# Altium PCB PCB1.PcbDoc
Units mm, origin at the board's own origin, x right, y up, seen from the top; angles counter-clockwise.
Board outline 152.4 x 101.6 mm, 2 copper layers (Top Layer, Bottom Layer); 19 components, 46 nets, 150 pads, 0 vias.
Unrouted connection lines stored in the file: 1.
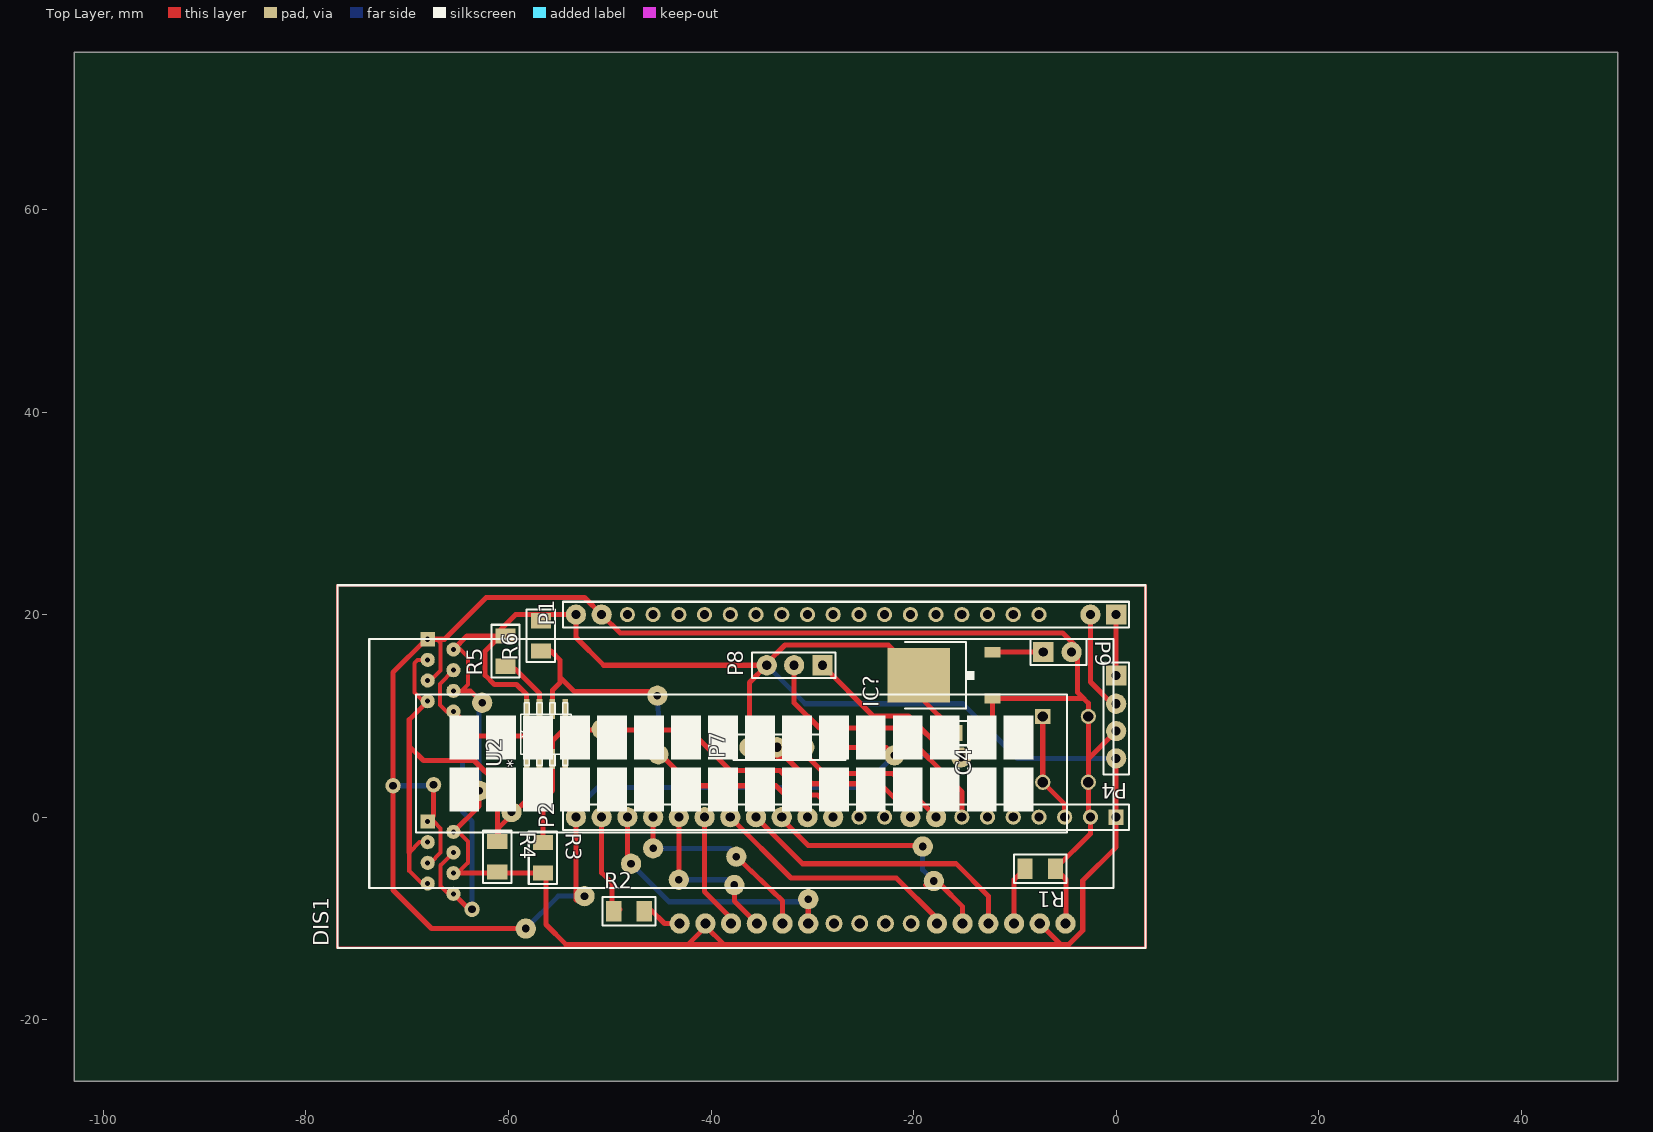
[diagram p0: Top Layer view]
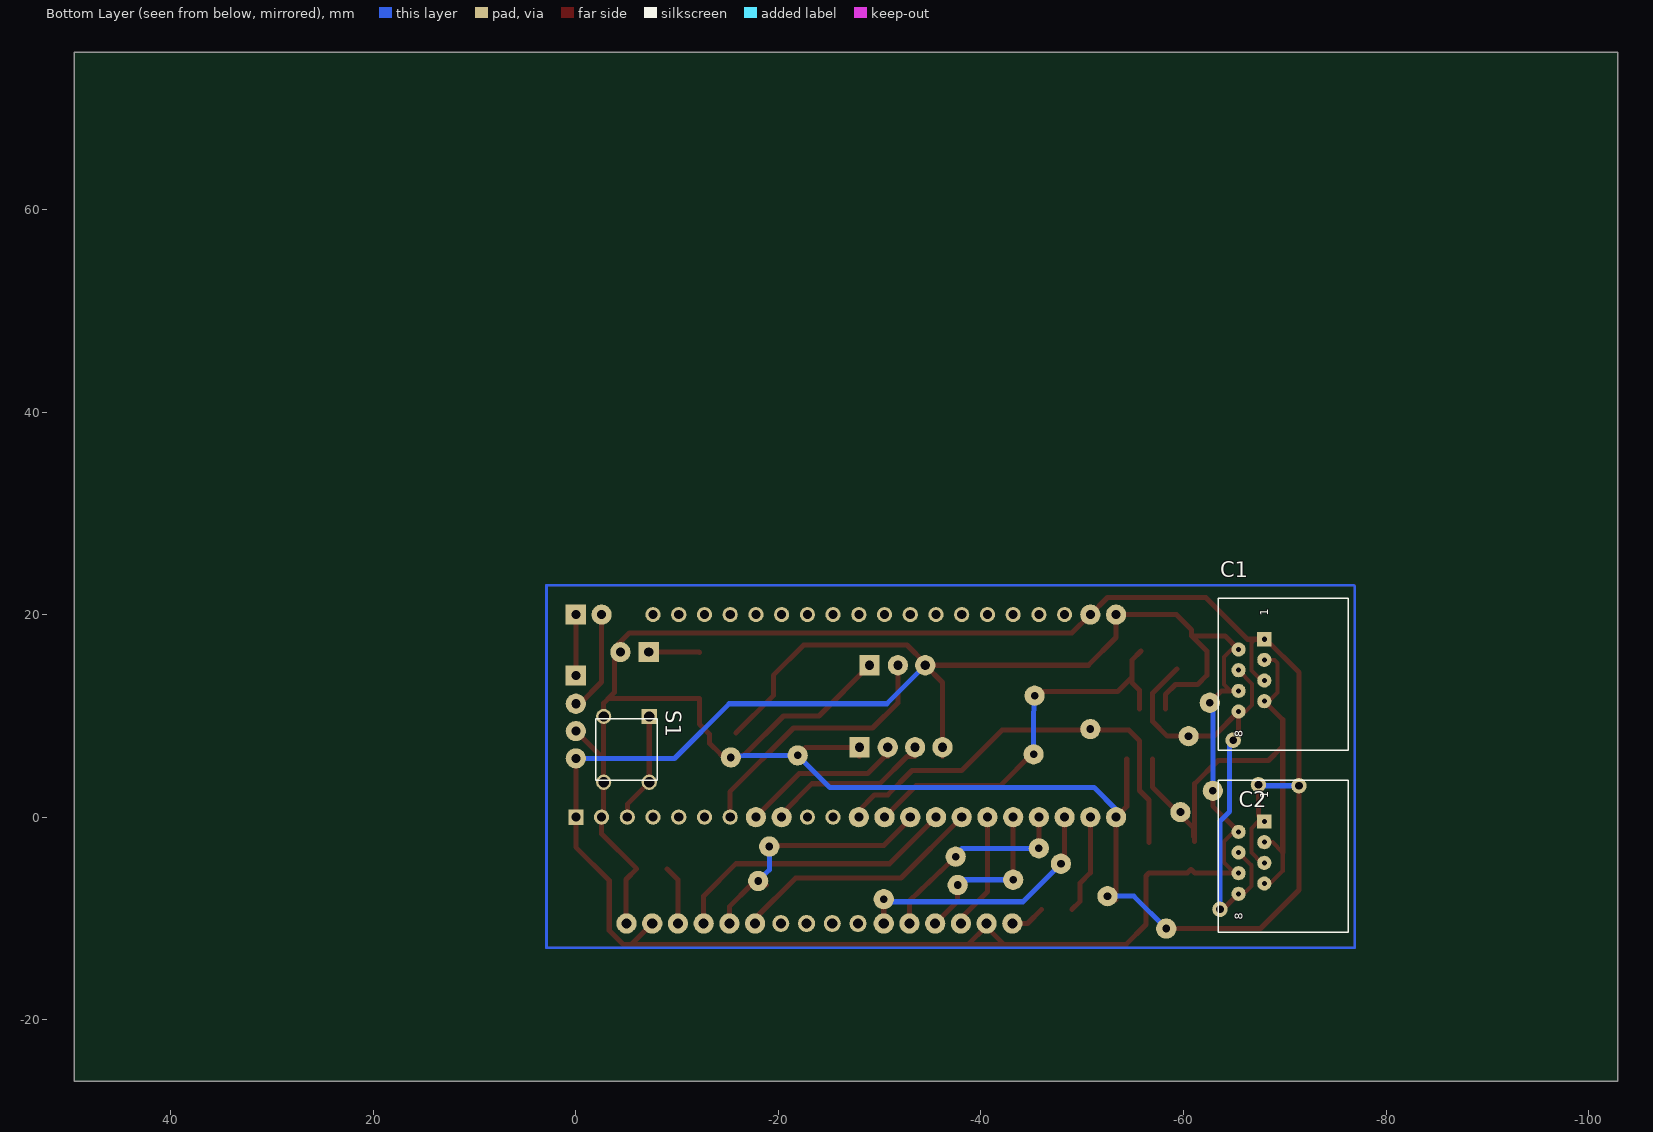
[diagram p1: Bottom Layer view, seen from below]
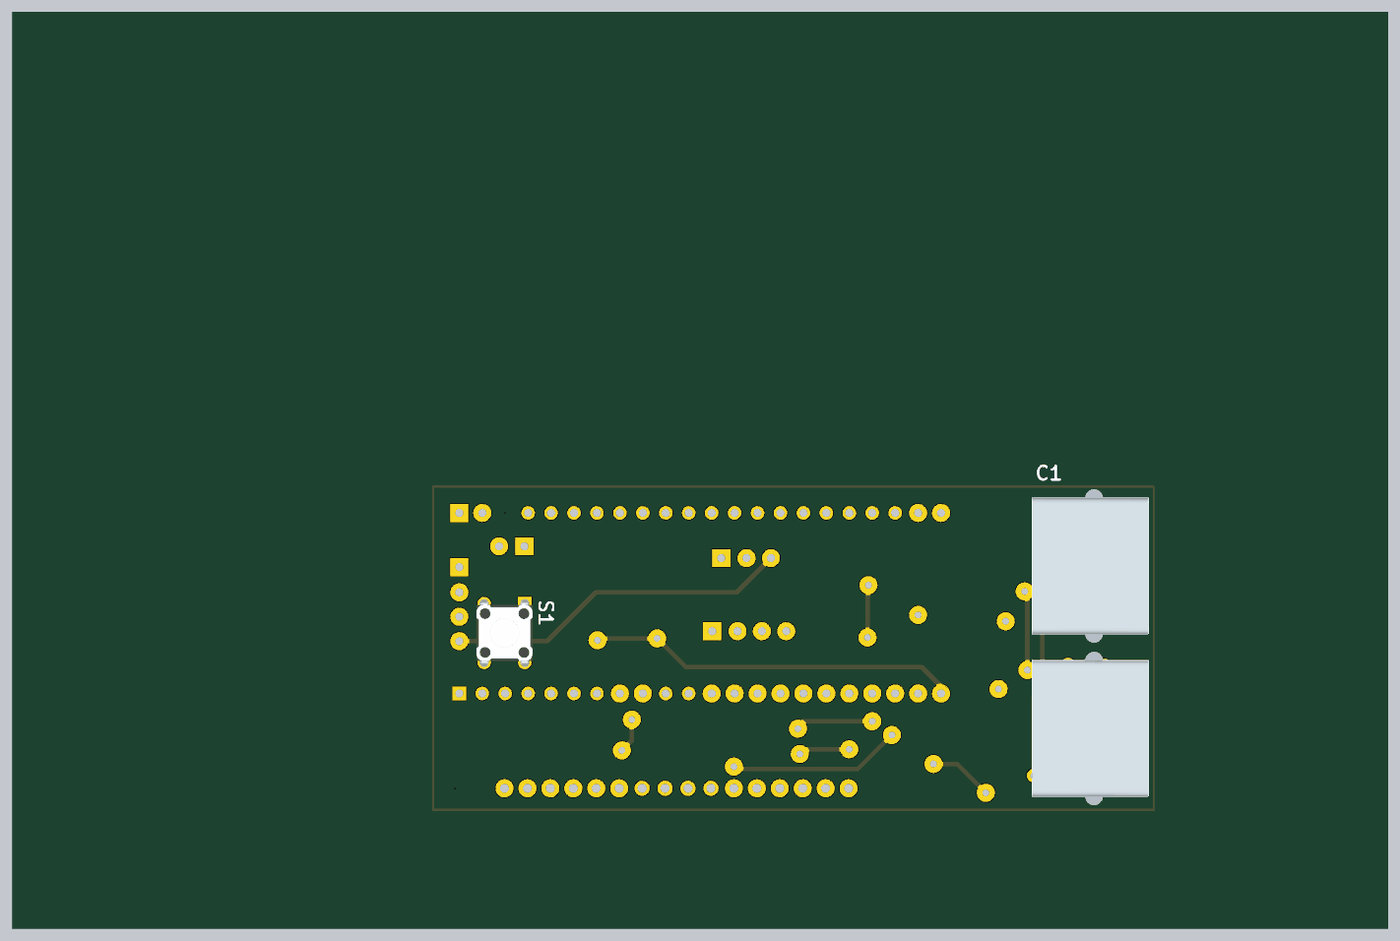
[diagram p2: 3D render of the assembled board from below, using the file's embedded part models]

## Layer stack, top to bottom
Top Solder: solder mask 0.0102, Solder Resist, Dk 3.5
Top Layer: signal copper 0.0356
Dielectric 1: dielectric 0.32, FR-4, Dk 4.8
Bottom Layer: signal copper 0.0356
Bottom Solder: solder mask 0.0102, Solder Resist, Dk 3.5

## Board outline
-102.875,-26.075 49.525,-26.075 49.525,75.525 -102.875,75.525

## Design rules (kind name [scope] priority, off if disabled: settings)
Clearance [All] p1: gap=0.4
PolygonConnect [All] p1: connectstyle=Relief reliefconductorwidth=0.254 reliefentries=4 polygonreliefangle="90 Angle" airgapwidth=0.254
RoutingVias [All] p1: holewidth=0.711 width=1.27 viastyle="Through Hole" minholewidth=0.711 minwidth=1.27 maxholewidth=0.711 maxwidth=1.27
SolderMaskExpansion [All] p1: expansion=0.102
Width [All] p1: maxlimit=1 minlimit=0.2 preferedwidth=0.5 minimp=50.000000 maximp=50.000000 favimp=50.000000
30 further rules are at their usual default settings.

## Components (designator, comment, footprint, x,y, rotation, side; value= is the part's Value field where it differs from the comment)
C1 "WE-Modular Jack 615008148521" 615008148521 -66.71,14 r90 bottom locked
C2 "WE-Modular Jack 615008148521" 615008148521 -66.71,-4 r90 bottom locked
C4 "10uF" C0805-1.25 -14.8,8.3 r180 top
DIS1 "Tuxgraphics LCD display 16x2 characters reflective, without background light   Source: tuxgr_12x2_r2.pdf" TUXGR_16X2_R2 -37,5 r180 top locked
IC? "Adjustable Output Low Dropout Voltage Regulator 800 mA   Source: http://www.onsemi.com/pub/Collateral/MC33269-D.PDF" DPACK -17,14 r90 top locked
P1 "Header 22" HDR1X22#1 0,20 r180 top locked
P2 "Header 22" HDR1X22#2 0,0 r180 top locked
P4 "UART" HDR1X4 0,14 r270 top locked
P7 "HC-SR04" HDR1X4 -28,6.9 r180 top locked
P8 "LM" HDR1X3 -29,15 r180 top locked
P9 "VIN" HDR1X2 -7.2,16.3 r0 top
R1 "R" R1206-0.55 -7.5,-5.1 r180 top
R2 "R" R1206-0.55 -48.1,-9.3 r0 top
R3 "R" R1206-0.55 -56.6,-4 r270 top
R4 "R" R1206-0.55 -61.1,-3.9 r270 top
R5 "R" R1206-0.55 -60.3,16.4 r90 top
R6 "R" R1206-0.55 -56.8,17.9 r90 top
S1 "" 4301x60437x6 -5,6.7 r270 bottom
U2 "P82B715_D_8" D8 -56.3,8.2 r90 top

## Footprints (in the part's own frame and the unit in brackets; to place one, negate y for a bottom-side part, rotate by r counter-clockwise, add the part's x,y. Pads: shape width x height; smd on the part's side, far side on the other; paste and mask are expansions set on the pad)
4301x60437x6 [mm] "6*6mm vertical type, THT, height 4.3mm, salmon actuator 360gf, Bulk"
  rect 1.5x1.5 hole 1: 1(-3.25,2.25)
  round 1.5 hole 1: 2(-3.25,-2.25) 3(3.25,2.25) 4(3.25,-2.25)
  silkscreen extent -3.04,-3.04 3.04,3.04, body extent -3.95,-3.1 3.95,3.1, height 4.31
615008148521 [mm] "WR-MJ_Modular Jacks_Plastic  WR-MJ_Modular Jacks_Plastic_Horizontal_Tab UP"
  rect 1.4x1.4 hole 0.5: 1(3.57,-1.27)
  round 1.4 hole 0.5: 2(2.55,1.27) 3(1.53,-1.27) 4(0.51,1.27) 5(-0.51,-1.27) 6(-1.53,1.27) 7(-2.55,-1.27) 8(-3.57,1.27)
  round 0 all layers, no hole: ""(-7.5,-3.57) ""(7.5,-3.57)
  silkscreen extent -7.38,-9.57 7.62,3.28, body extent -8.63,-9.57 8.87,3.28, height 14.51
C0805-1.25 [mm] "Capacitor Chip 0805 Height 1.25mm"
  rect 1.3x1.6 smd: 1(-1,0) 2(1,0)
  silkscreen extent -2,-1.2 2,1.2, body extent -0.9,-0.63 0.9,0.64, height 1.26
D8 [mil]
  rect 78x22 smd: 1(-97,75) 2(-97,25) 3(-97,-25) 4(-97,-75) 5(97,-75) 6(97,-25) 7(97,25) 8(97,75)
  silkscreen extent -122,-98 122,99
DPACK [mm]
  rect 1x1.6 smd: 1(-2.28,-4.8) 3(2.28,-4.8)
  rect 5.4x6.2 smd: 2(0,2.5)
  silkscreen extent -3.28,-3.02 3.28,3.84
HDR1X2 [mm] "Connector; Header; 2 Position"
  rect 2x2 hole 0.9: 1(0,0)
  round 2 hole 0.9: 2(2.8,0)
  silkscreen extent -1.27,-1.27 4.28,1.27
HDR1X3 [mm] "Connector; Header; 3 Position"
  rect 2x2 hole 0.9: 1(0,0)
  round 2 hole 0.9: 2(2.8,0) 3(5.5,0)
  silkscreen extent -1.27,-1.27 6.95,1.27
HDR1X4 [mm] "Connector; Header; 4 Position"
  rect 2x2 hole 0.9: 1(0,0)
  round 2 hole 0.9: 2(2.8,0) 3(5.5,0) 4(8.2,0)
  silkscreen extent -1.27,-1.27 9.77,1.27
HDR1X22#1 [mm] "Connector; Header; 22 Position"
  rect 2x2 hole 0.9: 1(0,0)
  round 2 hole 0.9: 2(2.54,0) 21(50.8,0) 22(53.34,0)
  round 0 all layers, no hole: 3(5.08,0)
  round 1.5 hole 0.9: 4(7.62,0) 5(10.16,0) 6(12.7,0) 7(15.24,0) 8(17.78,0) 9(20.32,0) 10(22.86,0) 11(25.4,0) 12(27.94,0) 13(30.48,0) 14(33.02,0) 15(35.56,0) 16(38.1,0) 17(40.64,0) 18(43.18,0) 19(45.72,0) 20(48.26,0)
  silkscreen extent -1.27,-1.27 54.61,1.27
HDR1X22#2 [mm] "Connector; Header; 22 Position"
  rect 1.5x1.5 hole 0.9: 1(0,0)
  round 1.5 hole 0.9: 2(2.54,0) 3(5.08,0) 4(7.62,0) 5(10.16,0) 6(12.7,0) 7(15.24,0) 10(22.86,0) 11(25.4,0)
  round 2 hole 0.9: 8(17.78,0) 9(20.32,0) 12(27.94,0) 13(30.48,0) 14(33.02,0) 15(35.56,0) 16(38.1,0) 17(40.64,0) 18(43.18,0) 19(45.72,0) 20(48.26,0) 21(50.8,0) 22(53.34,0)
  silkscreen extent -1.27,-1.27 54.61,1.27
R1206-0.55 [mm] "Resistor Chip 1206 Height 0.55mm"
  rect 1.5x2 smd: 1(-1.5,0) 2(1.5,0)
  silkscreen extent -2.6,-1.4 2.6,1.4, body extent -1.6,-0.8 1.6,0.8, height 0.56
TUXGR_16X2_R2 [mm]
  round 0 all layers, no hole: 1(-37.5,-15.5) 1(-37.5,15.5) 1(37.5,-15.5) 1(37.5,15.5)
  round 2 hole 1: 1(-32,15.5) 2(-29.46,15.5) 3(-26.92,15.5) 4(-24.38,15.5) 5(-21.84,15.5) 6(-19.3,15.5) 11(-6.6,15.5) 12(-4.06,15.5) 13(-1.52,15.5) 14(1.02,15.5) 15(3.56,15.5) 16(6.1,15.5)
  round 1.676 hole 1: 7(-16.76,15.5) 8(-14.22,15.5) 9(-11.68,15.5) 10(-9.14,15.5)
  silkscreen extent -39.9,-17.9 39.9,17.9

## Part data
C1 C2: "WR-MJ_Modular Jacks_Plastic_8P8C"
C4: library part C, "Capacitor, generic"
DIS1: library part TUXGR_16X2_R2
IC?: library part MC33269?*D
P1 P2: "Header, 22-Pin"
P4 P7: library part "Header 4", "Header, 4-Pin"
P8: library part "Header 3", "Header, 3-Pin"
P9: library part "Header 2", "Header, 2-Pin"
R1 R2 R3 R4 R5 R6: "Resistor, generic"
S1: library part "WS-TATV, 430186043716", "WS-TATV 6x6 mm THT"

## Free pads (board coordinates)
  round 1.524 hole 0.762: 36(-67.4,3.2) 37(-71.4,3.1) 61(-60.5,8) 64(-63.6,-9.1) 65(-64.9,7.6)
  round 2 hole 0.762: 38(-21.9,6.1) 39(-15.3,5.9) 46(-37.7,-6.7) 47(-43.18,-6.18) 48(-45.72,-3.08) 49(-47.9,-4.6) 50(-37.5,-3.9) 51(-30.4,-8.1) 52(-45.3,12) 53(-45.2,6.2) 54(-19.1,-2.9) 55(-18,-6.3) 56(-62.9,2.6) 57(-62.6,11.3) 58(-58.3,-11) 59(-52.5,-7.8) 60(-50.8,8.7) 62(-60.5,8) 63(-59.7,0.5)

## Nets (pads, with @x,y where several pads share a name; then routed paths per layer and width w, separated by ;. In a path a pad name is that pad's centre, name@x,y a point inside that pad or via, vN(x,y) a via of type N, cw(c..) or ccw(c..) an arc to the next point about the centre after c; other vN are vias at no path point)
ECHO: P2.8 P7.2 | length 15.5
  Top Layer w0.5: P7.2@-30.8,6 -30.5,6 -28.8,4.3 -22.027,4.3 -17.78,0.053 P2.8
GND: C1.1 C1.5 C2.1 C2.5 C4.1 DIS1.1@0.5,20.5 DIS1.1@-5,-10.5 IC?.1 P1.21 P2.2 P2.22 P4.3 P7.1 P8.1 P9.2 pad.36 pad.37 pad.38 pad.39 pad.58 pad.59 R1.1 S1.2 S1.4 U2.4 | length 264.6
  Top Layer w0.4: C2.5 -67.71,-4.51 -66.7,-3.5 -66.7,-1.1 -67.37,-0.43 C2.1 ; C1.5 -67.71,13.49 -66.7,14.5 -66.7,17.2 -67.07,17.57
  Top Layer w0.5: C2.1 -67.4,0.15 pad.36 ; pad.58 -67.6,-11 -71.4,-7.2 pad.37 -71.4,14.302 -68.132,17.57 C1.1 -67.07,17.57 -66.329,17.57 -62.199,21.7 -52.5,21.7 P1.21 -49,18.2 -5.3,18.2 -3.8,16.7 -3.8,12.3 -2.75,11.25 ; U2.4 -54.395,1.055 P2.22 pad.59@-53.34,-8.16 ; P8.1 -24,10 -20.5,10 -16.7,6.2 pad.39 -14.3,6.2 -13.2,7.3 -13.2,8.187 -12.2,9.187 IC?.1 -12.18,11.7 -3.2,11.7 -2.75,11.25 ; P7.1@-28,6 -27.1,6.9 -22.7,6.9 pad.38 ; DIS1.1@-5,-10.5 -4.947,-10.447 -4.947,-6.153 R1.1 -2.54,-1.64 P2.2 -2.75,0.21 -2.75,5.75 ; P4.3 -2.75,5.75 ; -2.75,5.75 -2.75,11.25
  Bottom Layer w0.5: pad.37 -67.5,3.1 pad.36 ; pad.58 -55.1,-7.8 pad.59 ; P2.22 -53.34,0.76 -51.179,2.921 -25.079,2.921 pad.38 -16.6,6.1 pad.39
LCL: C1.4 C1.8 C2.4 C2.8 pad.61 pad.62 pad.64 pad.65 R5.1 U2.7 | length 50.8
  Top Layer w0.4: C2.8 -65.93,-7.57 -66.7,-6.8 -66.7,-4.75 C2.4 ; C1.8 -66.13,10.43 -66.78,11.08 -66.78,13.17 C1.4
  Top Layer w0.5: C2.8 -63.91,-9.1 pad.64 ; pad.65 -65.44,8.14 C1.8 -63.01,8 -58.4,8 -56.935,9.465 U2.7 -56.935,12.235 R5.1@-59.35,14.65
  Bottom Layer w0.5: pad.65 -64.55,7.95 -64.55,0.542 -63.6,-0.408 pad.64
LDA: C1.3 C1.7 C2.3 C2.7 pad.63 R4.1 U2.2 | length 53.2
  Top Layer w0.4: C2.7 -68.55,-6.55 -69.8,-5.3 -69.8,-3.5 -68.77,-2.47 C2.3 ; C1.7 -68.45,11.45 -69.3,12.3 -69.3,15.2 -68.97,15.53 C1.3
  Top Layer w0.5: -69.8,-3.5 -69.8,9.63 C1.7 ; -69.65,6.85 -68.4,5.6 -63.4,5.6 -61.1,3.3 R4.1 ; R4.1@-61,-1.9 -61,-1.1 -56.935,2.965 U2.2
NetDIS1_3: DIS1.3 R1.2 | length 5.8
  Top Layer w0.5: DIS1.3 -10.08,-6.18 R1.2
NetDIS1_16: DIS1.16 R2.2 | length 3.5
  Top Layer w0.5: R2.2@-46,-9.1 -44.6,-10.5 DIS1.16
NetIC?_3: IC?.3 P9.1 | length 5
  Top Layer w0.5: IC?.3 -12.18,16.3 P9.1
OUT: P2.7 P8.2 | length 26.8
  Top Layer w0.5: P8.2 -31.8,11.3 -29.3,8.8 -21.5,8.8 -15.2,2.5 -15.2,0 P2.7@-15.6,0
P0_0: P1.5
P0_1: P1.6
P0_2: P1.7
P0_3: P1.8
P0_4: P1.9
P0_5: P1.10
P0_6: P1.11
P0_7: P1.12
P1_0: P1.13
P1_1: P1.14
P1_2: P1.15
P1_3: P1.16
P1_4: P1.17
P1_5: P1.18
P1_6: P1.19
P1_7: P1.20
P2_0: P2.21 R2.1 | length 9.8
  Top Layer w0.5: P2.21 -50.8,-5.5 -49.8,-6.5 -49.8,-8.3 R2.1@-49,-9.1
P2_1: DIS1.11 P2.20 pad.49 pad.51 | length 26.4
  Top Layer w0.5: P2.20 -48.26,-4.24 pad.49 ; DIS1.11 pad.51 pad.51@-30.3,-8
  Bottom Layer w0.5: pad.49 -44.15,-8.35 -30.65,-8.35 pad.51
P2_2: DIS1.12 P2.19 pad.48 pad.50 | length 20.3
  Top Layer w0.5: P2.19 pad.48 pad.48@-45.7,-3.1 ; pad.50 -32.94,-8.26 DIS1.12
  Bottom Layer w0.5: pad.48 -38.12,-3.08 pad.50
P2_3: DIS1.13 P2.18 pad.46 pad.47 | length 16.6
  Top Layer w0.5: pad.47@-43.2,-6.2 pad.47 P2.18 ; pad.46 -37.7,-8.28 DIS1.13
  Bottom Layer w0.5: pad.47 -38.22,-6.18 pad.46
P2_4: DIS1.14 P2.17 | length 11.6
  Top Layer w0.5: P2.17 -40.64,-7.36 -38.02,-9.98 DIS1.14
P2_5: DIS1.6 P2.16 | length 25
  Top Layer w0.5: P2.16 -32.1,-6 -21.7,-6 -17.7,-10 DIS1.6
P2_6: DIS1.4 P2.15 | length 28.9
  Top Layer w0.5: P2.15 -30.96,-4.6 -15.8,-4.6 -12.62,-7.78 DIS1.4
P2_7: DIS1.5 P2.14 pad.54 pad.55 | length 25.7
  Top Layer w0.5: P2.14 -33.02,-0.18 -30.4,-2.8 pad.54@-18.6,-2.8 ; pad.55@-18.8,-6.7 -17.3,-6.7 -15.16,-8.84 DIS1.5
  Bottom Layer w0.5: pad.54 -19.1,-5.2 pad.55
P3_2: P2.11
P3_3: P2.10
P3_7: P2.6
P4_2: P1.3
P4_3: P1.4
RX: P1.1 P4.1 | length 6
  Top Layer w0.5: P4.1 P1.1
SCL: P2.13 pad.52 pad.53 R6.1 U2.6 | length 39.8
  Top Layer w0.5: -55.8,16.4 -54.9,15.5 -54.9,13.8 ; U2.6 -55.665,12.535 -54.9,13.3 -54.9,13.8 ; pad.52 -45.7,12.4 -53.5,12.4 -54.9,13.8 ; pad.53@-45.1,6.3 -41.9,3.1 -33.58,3.1 P2.13
  Bottom Layer w0.5: pad.52 -45.2,10 pad.53
SDA: P2.12 pad.60 R3.1 U2.3 | length 42.5
  Top Layer w0.5: R3.1 -56.6,1.7 -55.665,2.635 U2.3 -55.665,7.535 -54.6,8.6 -42.1,8.6 -38.1,4.6 -33.2,4.6 -30.8,2.2 -29.5,2.2 -27.94,0.64 P2.12
SWDCLK: P2.4
SWDIO: P2.5
TRIG: P2.9 P7.3 | length 15.9
  Top Layer w0.5: P7.3@-33.5,6 -32.7,6 -30,3.3 -23.3,3.3 -20.32,0.32 P2.9
TX: P1.2 P4.2 | length 10.1
  Top Layer w0.5: P1.2 -2.54,13.34 -0.4,11.2 P4.2
VCC: C1.2 C1.6 C2.2 C2.6 C4.2 DIS1.2 DIS1.15 IC?.2 P1.22 P2.1 P4.4 P7.4 P8.3 pad.56 pad.57 R3.2 R4.2 R5.2 R6.2 U2.8 | length 242.4
  Top Layer w0.4: C2.2 -64.95,-1.45 -64,-2.4 -64,-4.5 C2.6@-65.03,-5.53 ; C1.6 -64.63,12.47 -64,13.1 -64,15.8 -64.75,16.55 C1.2
  Top Layer w0.5: C2.6 -65.03,-5.53 -61.13,-5.53 -60.75,-5.15 -60.4,-5.5 R3.2 -56.3,-5.8 -56.3,-10.6 -54.3,-12.6 -42.3,-12.6 ; C2.2 -62.9,1.09 pad.56 ; C1.2 -64.09,17.9 R5.2@-60.8,17.9 ; -64.63,12.47 -63.77,12.47 pad.57 ; U2.8 -58.205,12.105 -59.2,13.1 -61.4,13.1 -62.3,14 -62.3,16.4 R5.2@-60.8,17.9 ; DIS1.15@-40.6,-10.4 -40.6,-10.7 DIS1.15@-40.56,-10.74 ; DIS1.15 DIS1.15@-40.56,-10.74 ; P7.4@-36.2,6 -36.2,13.3 P8.3 -34.5,15.2 -32.7,17 -22.5,17 IC?.2 -19.5,12 C4.2 ; P8.3@-35.4,15 -50.6,15 -53.34,17.74 P1.22 -59.3,20 -60.8,18.5 R5.2@-60.8,17.9 ; DIS1.2 -5.42,-12.62 ; P4.4 P2.1 0,-2.96 -3.3,-6.26 -3.3,-11.2 -4.7,-12.6 -38.7,-12.6 ; -42.3,-12.6 -38.7,-12.6 ; -42.3,-12.6 -40.56,-10.86 DIS1.15@-40.56,-10.74 ; DIS1.15@-40.56,-10.74 -38.7,-12.6
  Bottom Layer w0.5: pad.56 -62.9,11 pad.57 ; P8.3 -30.701,11.201 -15.138,11.201 -9.737,5.8 P4.4
XRES: P2.3 S1.1 S1.3 | length 10.8
  Top Layer w0.5: S1.1 S1.3 -5.08,1.28 P2.3
pads on no net: C1. C2. DIS1.1@0.5,-10.5 DIS1.1@-74.5,20.5 DIS1.1@-74.5,-10.5 DIS1.7 DIS1.8 DIS1.9 DIS1.10 U2.1 U2.5
copper on no net: | length 462.3
  Top Layer w0.254: -76.9,-12.9 2.9,-12.9 2.9,22.9 -76.9,22.9 -76.9,-12.9
  Bottom Layer w0.254: 2.896,22.911 -76.556,22.911 -76.789,22.911 -76.9,22.8 -76.9,-12.9 2.9,-12.9 2.9,22.9

## Text inside footprints (layer, text, board x,y; h text height)
C1: Bottom Overlay "1" at -68.36,19.875 h0.8 r270; Bottom Overlay "8" at -65.86,7.875 h0.8 r270
C2: Bottom Overlay "1" at -68.36,1.875 h0.8 r270; Bottom Overlay "8" at -65.86,-10.125 h0.8 r270
U2: Top Overlay "*" at -58.637,4.898 h1.97 r90; Mechanical 16 "*" at -58.637,4.898 h1.97 r90